# EAGLE board design (EAGLE 9.7.0)
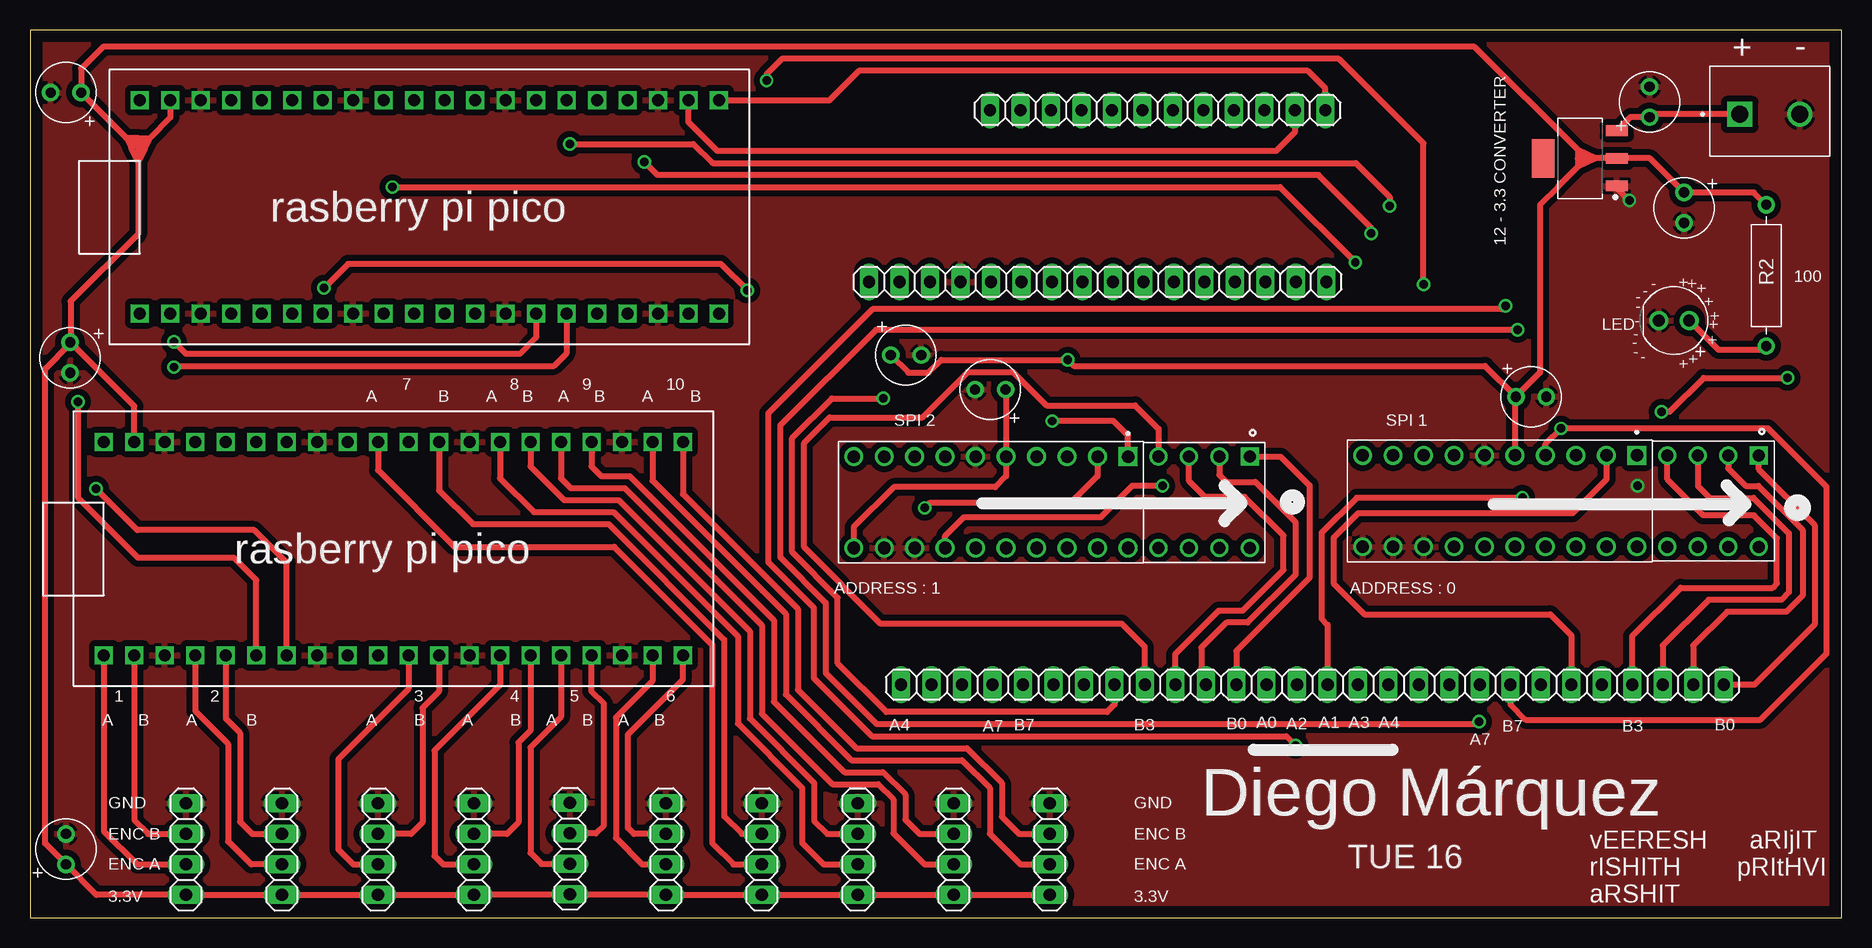
[diagram p0: board, top side]
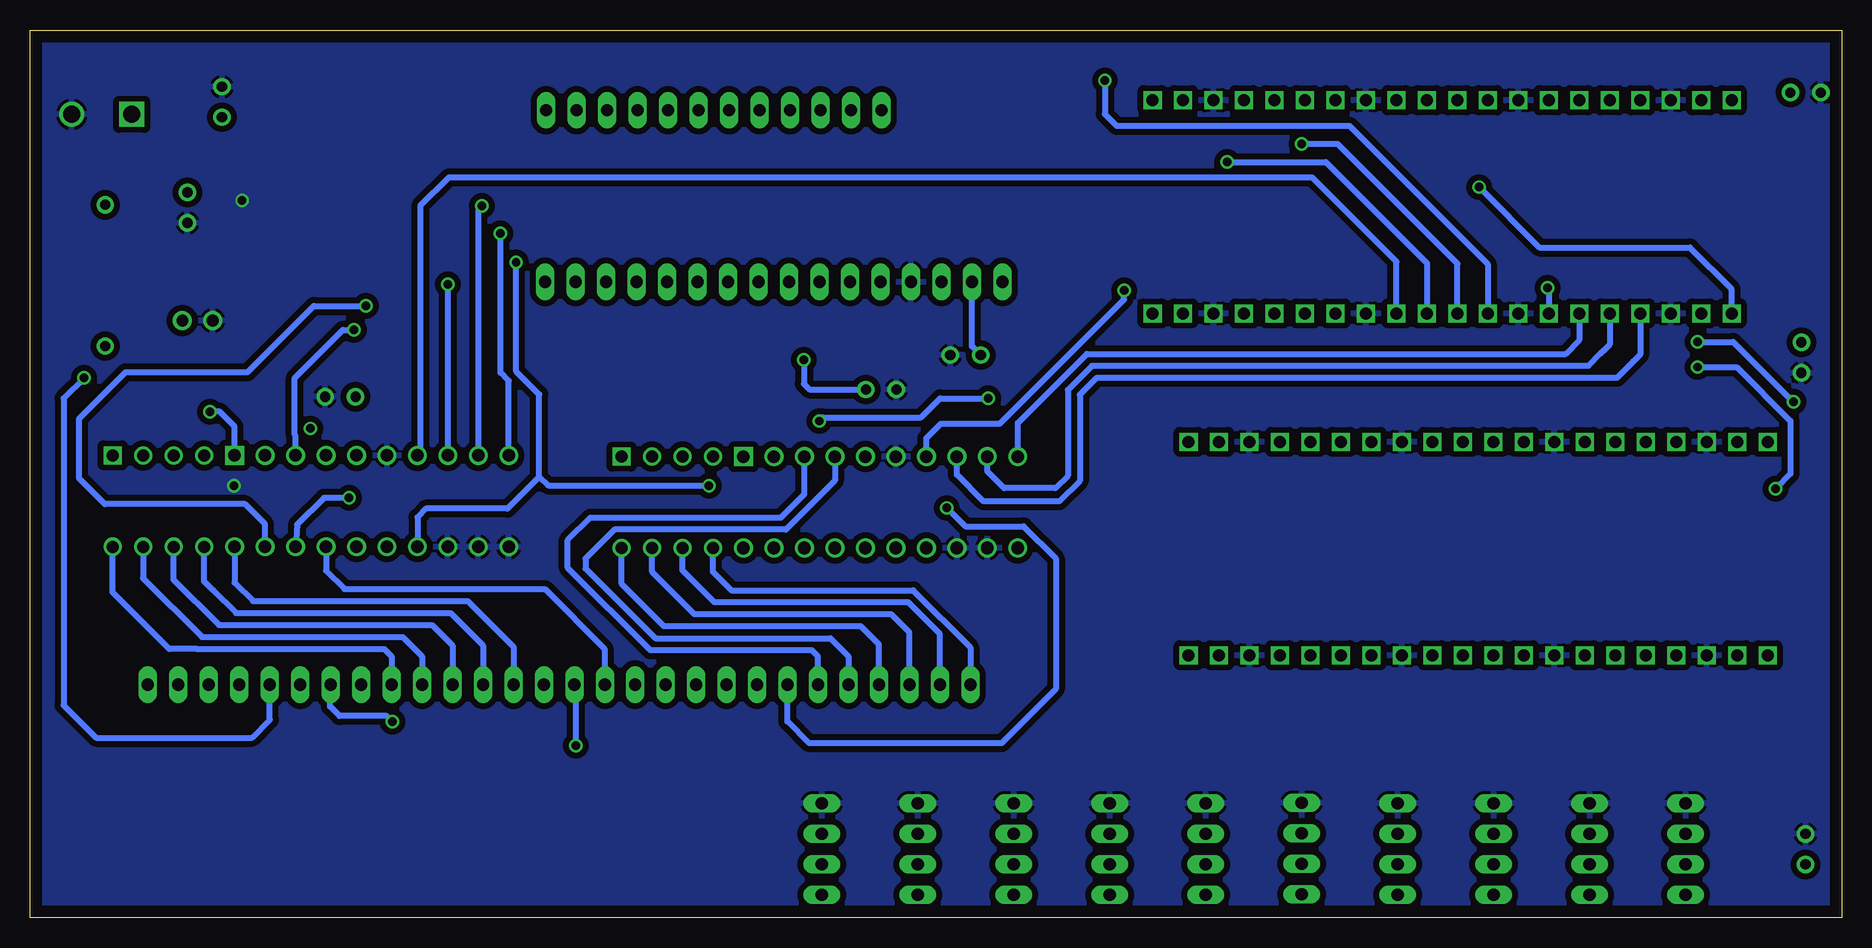
[diagram p1: board, bottom side, seen from below]

Size 151 x 74 mm. Coordinates in mm from the lower left corner, seen from the top.
Outline: 0,0 151,0 151,74 0,74 0,0
Copper layers (1*16): Top 0.035mm / dielectric 1.5mm / Bottom 0.035mm
Design rules "Fusion Electronics Design Rules": minimum track width 0.5mm, minimum drill 0.7mm, track to track 0.5mm, track to pad 0.5mm, pad to pad 1mm, via to via 1mm, smd to smd 6mil, copper to edge 1mm, drill to drill 1mm, minimum pad ring 10mil, minimum via ring 8mil, stop-mask expansion 4mil, vias tented up to drill 9999mil, thermal gap 10mil

## Footprints (pad centres in the part's own frame; a part is rotated, then mirrored left to right if it is on the bottom)
CAPPRD254W65D500H1150B = drill 0.85 pad 1.45: 1 -1.27,0; 2 1.27,0
LEDRD254W60D565H860B_B = drill 0.981 pad 1.581: A -1.27,0; C 1.27,0
SOT230P700X170-4 = smd 1.86 x 0.898: 1 -3.075,2.3; 2 -3.075,0; 3 -3.075,-2.3 | smd 1.86 x 3.189: 4 3.075,0
TE_1-2199298-2 = drill 1 square: 1 -3.81,3.81 | drill 1: 2 -3.81,1.27; 3 -3.81,-1.27; 4 -3.81,-3.81; 5 3.81,-3.81; 6 3.81,-1.27; 7 3.81,1.27; 8 3.81,3.81
AMPHENOL_DILB20P-223TLF = drill 1.05 square: 01 -3.81,11.43 | drill 1.05: 02 -3.81,8.89; 03 -3.81,6.35; 04 -3.81,3.81; 05 -3.81,1.27; 06 -3.81,-1.27; 07 -3.81,-3.81; 08 -3.81,-6.35; 09 -3.81,-8.89; 10 -3.81,-11.43; 11 3.81,-11.43; 12 3.81,-8.89; 13 3.81,-6.35; 14 3.81,-3.81; 15 3.81,-1.27; 16 3.81,1.27; 17 3.81,3.81; 18 3.81,6.35; 19 3.81,8.89; 20 3.81,11.43
HANDSON_KF301-2P = drill 1.4 square: 1 -2.5,0 | drill 1.4: 2 2.5,0
1X12 = drill 1.016 long: 1 -13.97,0; 2 -11.43,0; 3 -8.89,0; 4 -6.35,0; 5 -3.81,0; 6 -1.27,0; 7 1.27,0; 8 3.81,0; 9 6.35,0; 10 8.89,0; 11 11.43,0; 12 13.97,0
1X16 = drill 1.016 long: 1 -19.05,0; 2 -16.51,0; 3 -13.97,0; 4 -11.43,0; 5 -8.89,0; 6 -6.35,0; 7 -3.81,0; 8 -1.27,0; 9 1.27,0; 10 3.81,0; 11 6.35,0; 12 8.89,0; 13 11.43,0; 14 13.97,0; 15 16.51,0; 16 19.05,0
RESAD1176W63L850D250B = drill 0.83 pad 1.43: 1 -5.88,0; 2 5.88,0
RASPBERRY_PI_PICO = drill 1 square: 3V3 8.89,12.7; 3V3_EN 8.89,15.24; ADC_VREF 8.89,10.16; AGND 8.89,5.08; GND 8.89,17.78; GND2 8.89,-7.62; GND3 8.89,-20.32; GND4 -8.89,17.78; GND5 -8.89,5.08; GND6 -8.89,-7.62; GND7 -8.89,-20.32; GP0 -8.89,22.86; GP1 -8.89,20.32; GP2 -8.89,15.24; GP3 -8.89,12.7; GP4 -8.89,10.16; GP5 -8.89,7.62; GP6 -8.89,2.54; GP7 -8.89,0; GP8 -8.89,-2.54; GP9 -8.89,-5.08; GP10 -8.89,-10.16; GP11 -8.89,-12.7; GP12 -8.89,-15.24; GP13 -8.89,-17.78; GP14 -8.89,-22.86; GP15 -8.89,-25.4; GP16 8.89,-25.4; GP17 8.89,-22.86; GP18 8.89,-17.78; GP19 8.89,-15.24; GP20 8.89,-12.7; GP21 8.89,-10.16; GP22 8.89,-5.08; GP26_A0 8.89,0; GP27_A1 8.89,2.54; GP28_A2 8.89,7.62; RUN 8.89,-2.54; VBUS 8.89,22.86; VSYS 8.89,20.32
1X04 = drill 1.016 long: 1 -3.81,0; 2 -1.27,0; 3 1.27,0; 4 3.81,0

## Placement (x,y rotation side)
C1  0.1uf  [CAPPRD254W65D500H1150B]  137.88,59.18 270 top
C2  0.1uf  [CAPPRD254W65D500H1150B]  135,68 90 top
C3  0.1uf  [CAPPRD254W65D500H1150B]  3,5.7 90 top
C4  0.1uf  [CAPPRD254W65D500H1150B]  73.01,46.89 0 top
C23  0.1uf  [CAPPRD254W65D500H1150B]  80.05,44.02 180 top
C24  0.1uf  [CAPPRD254W65D500H1150B]  125.13,43.42 0 top
C26  0.1uf  [CAPPRD254W65D500H1150B]  2.99,68.78 180 top
C27  0.1uf  [CAPPRD254W65D500H1150B]  3.35,46.68 270 top
D1  LED_RADIALBLUE  [LEDRD254W60D565H860B_B]  137.03,49.78 180 top
IC1  LD1117_SOT223  [SOT230P700X170-4]  129.2,63.3 180 top
J1  1-2199298-2  [TE_1-2199298-2]  97.88,34.62 270 top
J2  DILB20P-223TLF  [AMPHENOL_DILB20P-223TLF]  80.09,34.62 270 top
J3  1-2199298-2  [TE_1-2199298-2]  140.3,34.72 270 top
J4  DILB20P-223TLF  [AMPHENOL_DILB20P-223TLF]  122.52,34.72 270 top
J7  KF301-2P  [HANDSON_KF301-2P]  145.02,66.97 0 top
JP1  PINHD-1X12  [1X12]  86.59,19.41 0 top
JP2  PINHD-1X16  [1X16]  122.13,19.41 0 top
JP4  PINHD-1X12  [1X12]  94,67.32 180 top
JP5  PINHD-1X16  [1X16]  89,53 180 top
R2  [RESAD1176W63L850D250B]  144.73,53.54 90 top
U2  RASPBERRY_PI_PICO  [RASPBERRY_PI_PICO]  32.02,59.25 90 top
U3  RASPBERRY_PI_PICO  [RASPBERRY_PI_PICO]  29.02,30.76 90 top
U$1  PINHD-1X04_1X04M  [1X04]  85,5.7 90 top
U$2  PINHD-1X04_1X04M  [1X04]  77,5.7 90 top
U$3  PINHD-1X04_1X04M  [1X04]  69,5.7 90 top
U$4  PINHD-1X04_1X04M  [1X04]  61,5.7 90 top
U$5  PINHD-1X04_1X04M  [1X04]  53,5.7 90 top
U$6  PINHD-1X04_1X04M  [1X04]  45,5.75 90 top
U$7  PINHD-1X04_1X04M  [1X04]  37,5.7 90 top
U$8  PINHD-1X04_1X04M  [1X04]  29,5.7 90 top
U$9  PINHD-1X04_1X04M  [1X04]  21,5.7 90 top
U$10  PINHD-1X04_1X04M  [1X04]  13,5.7 90 top

## Library data of the parts
C1-C4 C23 C24 C26 C27 IC1 U$1-U$10 = Tinkercad
D1 = Opto-Electronic
J1 J3 = 1-2199298-2; AVAILABILITY: In Stock; CHECK_PRICES: https://www.snapeda.com/parts/1-2199298-2/TE+Connectivity+AMP+Connectors/view-part/?ref=eda; COMMENT: 1-2199298-2; DESCRIPTION: CONN IC DIP SOCKET 8POS TIN / 8 (2 x 4) Pos DIP, 0.3 (7.62mm) Row Spacing Socket Tin Through Hole; MF: TE Connectivity; MP: 1-2199298-2; PACKAGE: PDIP-8 TE Connectivity; PRICE: None; SNAPEDA_LINK: https://www.snapeda.com/parts/1-2199298-2/TE+Connectivity+AMP+Connectors/view-part/?ref=snap
J2 J4 = DILB20P-223TLF; AVAILABILITY: In Stock; CHECK_PRICES: https://www.snapeda.com/parts/DILB20P-223TLF/Amphenol/view-part/?ref=eda; DESCRIPTION: 20 (2 x 10) Pos DIP, 0.3 (7.62mm) Row Spacing Socket Tin Through Hole; MF: FCI Connectors; MP: DILB20P-223TLF; PACKAGE: None; PRICE: None; SNAPEDA_LINK: https://www.snapeda.com/parts/DILB20P-223TLF/Amphenol/view-part/?ref=snap
J7 = KF301-2P; AVAILABILITY: Not in stock; CHECK_PRICES: https://www.snapeda.com/parts/KF301-2P/Handson+Technology/view-part/?ref=eda; DESCRIPTION: 2 Pin Terminal Block 5mm Pitch; MF: Handson Technology; MP: KF301-2P; PACKAGE: None; PRICE: None; SNAPEDA_LINK: https://www.snapeda.com/parts/KF301-2P/Handson+Technology/view-part/?ref=snap
JP1 JP4 = Connector; CATEGORY: Headers; DESCRIPTION: Header, Straight, 12 Position; MANUFACTURER: Generic; MPN: Generic; OPERATING_TEMPERATURE: Generic; PART_STATUS: Active; PITCH: 0.100" (2.54mm); ROHS_COMPLIANCE: Generic; SERIES: Generic; SUB-CATEGORY: Headers, Male Pins; TYPE: Board to Board or Cable, Unshrouded, Through Hole, Straight
JP2 JP5 = Connector; CATEGORY: Headers; DESCRIPTION: Header, Straight, 16 Position; MANUFACTURER: Generic; MPN: Generic; OPERATING_TEMPERATURE: Generic; PART_STATUS: Active; PITCH: 0.100" (2.54mm); ROHS_COMPLIANCE: Generic; SERIES: Generic; SUB-CATEGORY: Headers, Male Pins; TYPE: Board to Board or Cable, Unshrouded, Through Hole, Straight
R2 = Resistor; CATEGORY: Resistor; SUB-CATEGORY: Fixed
U2 U3 = RASPBERRY_PI_PICO; AVAILABILITY: In Stock; CHECK_PRICES: https://www.snapeda.com/parts/RASPBERRY%20PI%20PICO/Raspberry+Pi/view-part/?ref=eda; DESCRIPTION: Raspberry Pi Board, Arm Cortex-M0+; Core Architecture:Arm; Core Sub-Architecture:Cortex-M0+; Kit Contents:Raspberry Pi Pico Board; No. Of Bits:32Bit; Silicon Core Number:Rp2040; Silicon Manufacturer:Raspberry Pi |Raspberry-Pi RASPBERRY PI PICO; MF: Raspberry Pi; MP: RASPBERRY PI PICO; PACKAGE: None; PRICE: None; SNAPEDA_LINK: https://www.snapeda.com/parts/RASPBERRY%20PI%20PICO/Raspberry+Pi/view-part/?ref=snap

## Nets
3.3V: C1.1 C3.1 C4.1 C23.1 C24.1 C26.1 C27.1 IC1.2 J2.05 J2.11 J4.05 JP5.15 R2.2 U2.VSYS U3.VSYS U$1.1 U$2.1 U$3.1 U$4.1 U$5.1 U$6.1 U$7.1 U$8.1 U$9.1 U$10.1
12V: C2.1 IC1.3 J7.1
CS1: J2.07 U2.GP5
CS2: J4.07 U2.GP9
ENC_1A: U3.GP0 U$10.2
ENC_1B: U3.GP1 U$10.3
ENC_2A: U3.GP2 U$9.2
ENC_2B: U3.GP3 U$9.3
ENC_3A: U3.GP8 U$8.2
ENC_3B: U3.GP9 U$8.3
ENC_4A: U3.GP10 U$7.2
ENC_4B: U3.GP11 U$7.3
ENC_5A: U3.GP12 U$6.2
ENC_5B: U3.GP13 U$6.3
ENC_6A: U3.GP14 U$5.2
ENC_6B: U3.GP15 U$5.3
ENC_7A: U3.GP26_A0 U$4.2
ENC_7B: U3.GP22 U$4.3
ENC_8A: U3.GP21 U$3.2
ENC_8B: U3.GP20 U$3.3
ENC_9A: U3.GP19 U$2.2
ENC_9B: U3.GP18 U$2.3
ENC_10A: U3.GP17 U$1.2
ENC_10B: U3.GP16 U$1.3
GND: C1.2 C2.2 C3.2 C4.2 C23.2 C24.2 C26.2 C27.2 D1.C IC1.1 J2.06 J2.12 J2.13 J4.06 J4.11 J4.12 J4.13 J7.2 JP5.13 U2.AGND U2.GND U2.GND2 U2.GND3 U2.GND4 U2.GND5 U2.GND6 U2.GND7 U3.AGND U3.GND U3.GND2 U3.GND3 U3.GND4 U3.GND5 U3.GND6 U3.GND7 U$1.4 U$2.4 U$3.4 U$4.4 U$5.4 U$6.4 U$7.4 U$8.4 U$9.4 U$10.4
GPA1: J3.8 JP2.8
LS1: J1.5 JP1.1
N$1: D1.A R2.1
N$2: J1.1 JP1.12
N$3: J1.2 JP1.11
N$4: J1.3 JP1.10
N$5: J1.4 JP1.9
N$6: J2.01 JP1.8
N$7: J1.8 JP1.4
N$8: J1.7 JP1.3
N$9: J2.02 JP1.7
N$10: J2.03 JP1.6
N$11: J2.04 JP1.5
N$12: J3.1 JP2.16
N$13: J3.2 JP2.15
N$14: J3.3 JP2.14
N$15: J3.4 JP2.13
N$16: J4.01 JP2.12
N$17: J1.6 JP1.2
N$18: J4.02 JP2.11
N$19: J4.03 JP2.10
N$20: J4.04 JP2.9
N$24: J3.7 JP2.7
N$25: J3.6 JP2.6
N$26: J3.5 JP2.5
N$27: J4.20 JP2.4
N$28: J4.18 JP2.3
N$33: J4.19 JP2.2
N$34: J4.17 JP2.1
RST: J2.14 J4.14 U2.GP0
SCL1: U2.GP11 U3.GP5
SCL2: JP4.2 U2.GP17
SDA1: U2.GP10 U3.GP4
SDA2: JP4.1 U2.GP16
SPI1CLK: J2.08 U2.GP2
SPI1RX: J2.10 U2.GP4
SPI1TX: J2.09 U2.GP3
SPI2CLK: J4.08 U2.GP6
SPI2RX: J4.10 U2.GP8
SPI2TX: J4.09 U2.GP7

## Tracks (layer width: path | path; a pad name or v marks a point on that pad's centre or on a via)
3.3V  (via drill 0.7 pad 1)
  Top 0.5: J4.05 123.79,43.35 C24.1 | J2.11 68.66,32.55 72.01,35.89 80.46,35.89 81.37,36.8 J2.05 81.37,43.98 C23.1 | U3.VSYS 8.7,42.64 3.39,47.95 | 3.39,47.95 C27.1 3.35,47.84 1.25,45.75 1.25,6.18 C3.1 5.54,1.89 U$10.1 U$9.1 U$8.1 U$7.1 37.05,1.94 U$6.1 52.95,1.94 U$5.1 U$4.1 U$3.1 U$2.1 U$1.1 | C24.1 125.86,45.42 125.86,59.42 127.39,60.96 127.37,60.96 129,62.59 | 129.71,63.3 130.5,63.3 | 130.5,63.3 IC1.2 135.03,63.3 C1.1 143.7,60.45 R2.2 | 129.71,63.3 129,62.59 | C4.1 73.22,45.42 74.9,45.42 75.98,46.5 v86.5,46.5 87,46 121.28,46 C24.1 | 129.71,63.3 129,64 | 129,64 120.41,72.6 6.09,72.6 4.27,70.78 C26.1 8.02,65.02 | 9,63 9,57 3.39,51.39 3.39,47.95 | 10,65 11.7,66.7 U2.VSYS | 129,64 129,63.3 | 129,63.3 129,62.59 | 129,62.59 130.5,63.3 | 130.5,63.3 129,64 | 129.71,63.3 129,63.3 | 8.02,65.02 8.02,65.01 | 8.02,65.01 8.42,64.2 | 8.42,64.2 9,63 | 8.02,65.02 9,65.01 | 9,65.01 10,65 | 9,63 9.6,64.2 | 9.6,64.2 10,65 | 9,65.01 9,63 | 8.42,64.2 10,65 | 9.6,64.2 8.02,65.01
  Bottom 0.5: v86.5,46.5 86.5,44.5 86.02,44.02 C23.1 | C4.1 72.49,47.64 JP5.15
12V
  Top 0.5: IC1.3 133.41,66.73 C2.1 135.24,66.97 J7.1
CS1  (via drill 0.7 pad 1)
  Top 0.5: v24.5,52.5 26.5,54.5 57.6,54.5 v59.8,52.3
  Bottom 0.5: v59.8,52.3 59.8,51.53 70.16,41.17 75.08,41.17 76.28,39.97 J2.07 | v24.5,52.5 24.46,52.5 24.4,52.44 U2.GP5
CS2
  Bottom 0.5: J4.07 118.46,38.78 118.46,59.34 116.1,61.7 44.11,61.7 37.1,54.69 U2.GP9
ENC_1A
  Top 0.5: U3.GP0 6.16,7.21 8.94,4.43 U$10.2
ENC_1B
  Top 0.5: U3.GP1 8.7,8.11 9.84,6.97 U$10.3
ENC_2A
  Top 0.5: U$9.2 18.44,4.43 16.52,6.35 16.52,14.47 13.78,17.22 U3.GP2
ENC_2B
  Top 0.5: U$9.3 18.54,6.97 17.52,7.99 17.52,15.39 16.32,16.59 U3.GP3
ENC_3A
  Top 0.5: U$8.2 26.94,4.43 25.7,5.67 25.7,13.21 31.56,19.07 U3.GP8
ENC_3B
  Top 0.5: U$8.3 31.76,6.97 32.73,7.93 32.73,17.47 34.1,18.84 U3.GP9
ENC_4A
  Top 0.5: U3.GP10 39.18,19.39 33.73,13.94 33.73,5.14 34.44,4.43 U$7.2
ENC_4B
  Top 0.5: U$7.3 39.76,6.97 40.73,7.93 40.73,14.6 41.72,15.59 U3.GP11
ENC_5A
  Top 0.5: U3.GP12 44.26,16.72 41.73,14.18 41.73,5.39 42.64,4.48 U$6.2
ENC_5B
  Top 0.5: U$6.3 47.16,7.02 47.84,7.69 47.84,17.83 46.8,18.87 U3.GP13
ENC_6A
  Top 0.5: U$5.2 51.04,4.43 48.84,6.63 48.84,16.67 51.88,19.72 U3.GP14
ENC_6B
  Top 0.5: U$5.3 50.34,6.97 49.84,7.47 49.84,15.26 54.42,19.84 U3.GP15
ENC_7A
  Top 0.5: U3.GP26_A0 29.02,37.3 35.41,30.91 48.7,30.91 56.87,22.74 56.87,6.2 58.64,4.43 U$4.2
ENC_7B
  Top 0.5: U$4.3 59.34,6.97 57.87,8.44 57.87,23.16 48.23,32.8 36.92,32.8 34.1,35.62 U3.GP22
ENC_8A
  Top 0.5: U3.GP21 39.18,36.62 42,33.8 48.64,33.8 59,23.44 59,16.17 64.37,10.8 64.37,6.21 66.16,4.43 U$3.2
ENC_8B
  Top 0.5: U3.GP20 41.72,37.62 44.54,34.8 49.06,34.8 60,23.86 60,16.59 65.37,11.21 65.37,8.04 66.44,6.97 U$3.3
ENC_9A
  Top 0.5: U3.GP19 44.26,36.62 45.08,35.8 49.57,35.8 61,24.37 61,17 66.88,11.12 70.69,11.12 71.97,9.84 71.97,7.03 74.57,4.43 U$2.2
ENC_9B
  Top 0.5: U3.GP18 46.8,37.62 47.62,36.8 49.99,36.8 62,24.79 62,18 67.88,12.12 71.1,12.12 72.97,10.25 72.97,8.15 74.16,6.97 U$2.3
ENC_10A
  Top 0.5: U3.GP17 51.88,36.43 61.05,27.27 61.05,27.25 63,25.3 63,18.59 68.46,13.12 77.68,13.12 80,10.8 80,7 82.57,4.43 U$1.2
ENC_10B
  Top 0.5: U3.GP16 54.42,35.31 64,25.73 64,19 68.88,14.12 78.09,14.12 81,11.21 81,8.41 82.44,6.97 U$1.3
GND  (via drill 0.7 pad 1)
  Top 0.5: IC1.1 132.28,60.82 v133.32,59.78
  other vias: 134,36
  pour Bottom (isolate 0.5): -0.75,-4.75 151.75,-4.75 151.75,75.75 -0.75,75.75
  pour Top (isolate 0.5): 3.1,-8.75 148.9,-8.75 153.75,-3.9 153.75,76.75 -2.75,76.75 -2.75,-2.9
GPA1
  Bottom 0.5: JP2.8 120.86,21.77 121.46,22.38 137,22.38 137.07,22.38 139.38,22.38 144.11,27.11 J3.8
LS1
  Bottom 0.5: JP1.1 72.62,22.52 77.38,27.28 92.53,27.28 94.06,28.81 J1.5
N$1
  Top 0.5: R2.1 144.39,47.32 140.76,47.32 D1.A
N$2
  Top 0.5: JP1.12 100.56,22.23 106.65,28.32 106.65,36.02 104.24,38.43 J1.1
N$3
  Top 0.5: JP1.11 97.64,19.78 97.64,22.5 99.73,24.59 101.5,24.59 105.49,28.58 105.49,32.97 102.13,36.33 99.72,36.33 99.14,36.9 J1.2
N$4
  Top 0.5: JP1.10 95.48,21.97 99.09,25.59 101.08,25.59 104.49,28.99 104.49,31.84 101.24,35.08 97.92,35.08 96.61,36.39 J1.3
N$5
  Top 0.5: JP1.9 92.94,22.57 91.01,24.5 70.9,24.5 64.53,30.88 64.53,39.57 66.66,41.7 74.38,41.7 78.17,45.5 81.93,45.5 84.73,42.7 92.11,42.7 94.06,40.75 J1.4
N$6  (via drill 0.7 pad 1)
  Top 0.5: J2.01 91.53,40.17 90.3,41.4 v85.2,41.4 | JP1.8 90.4,17.75 89.78,17.14 71.39,17.14 67.33,21.2 67.33,26.66 63.53,30.46 63.53,39.98 66.83,43.29 v71.13,43.29
  Bottom 0.5: v71.13,43.29 75.13,43.29 76.72,41.7 84.9,41.7 v85.2,41.4
N$7
  Bottom 0.5: J1.8 101.69,27.81 98.15,24.28 81.74,24.28 80.24,22.77 JP1.4
N$8
  Bottom 0.5: JP1.3 77.7,23.77 79.2,25.28 95.61,25.28 99.14,28.81 J1.7
N$9  (via drill 0.7 pad 1)
  Top 0.5: J2.02 88.98,36.8 86.74,34.55 74.97,34.55 v74.58,34.15
  Bottom 0.5: JP1.7 87.86,16.35 86.04,14.54 70.02,14.54 65.5,19.05 65.5,29.93 68.18,32.61 73.03,32.61 v74.58,34.15
N$10
  Bottom 0.5: J2.03 86.44,35.31 88.4,33.35 104.29,33.35 106.18,31.46 106.18,29.16 99.29,22.28 85.82,22.28 85.32,21.77 JP1.6
N$11
  Bottom 0.5: J2.04 83.91,36.43 87.99,32.35 102.27,32.35 104.69,29.94 104.69,29.09 98.87,23.28 84.28,23.28 82.78,21.77 JP1.5
N$12
  Top 0.5: J3.1 144.11,37.37 148.75,32.73 148.75,24.42 143.74,19.41 JP2.16
N$13
  Top 0.5: J3.2 141.57,37.45 141.55,37.45 143,36 144.06,36 147.75,32.31 147.75,26.84 146.41,25.5 141.47,25.5 138.64,22.67 JP2.15
N$14
  Top 0.5: J3.3 139.03,35.97 140,35 143.65,35 146.61,32.04 146.61,27.11 146,26.5 139.93,26.5 136.1,22.67 JP2.14
N$15
  Top 0.5: J3.4 136.49,36.53 139.48,33.54 143.69,33.54 145.61,31.62 145.61,27.86 145.25,27.5 137.59,27.5 133.56,23.47 JP2.13
N$16  (via drill 0.7 pad 1)
  Top 0.5: v136,42.17 136.67,42.17 139.5,45 v146.5,45
  Bottom 0.5: J4.01 133.95,40.93 135.19,42.17 v136,42.17 | JP2.12 131.02,16.48 132.5,15 145.5,15 148.2,17.7 148.2,43.3 v146.5,45
N$17
  Bottom 0.5: JP1.2 75.16,23.64 77.79,26.28 93.94,26.28 96.61,28.94 J1.6
N$18
  Top 0.5: JP2.11 128.48,23.52 126.71,25.29 111.23,25.29 108.65,27.86 108.65,31.65 110.7,33.7 128.57,33.7 131.41,36.53 J4.02
N$19  (via drill 0.7 pad 1)
  Top 0.5: v124,49 70.5,49 62.53,41.03 62.53,30.05 66.33,26.25 66.33,20.39 70.58,16.14 120.6,16.14 v120.8,16.33
  Bottom 0.5: v124,49 124.92,49 128.93,44.99 128.93,40.24 128.87,40.17 J4.03 | v120.8,16.33 121.27,16.8 125.2,16.8 126,17.6 126,19.35 JP2.10
N$20  (via drill 0.7 pad 1)
  Top 0.5: JP2.9 123.4,17.75 124.65,16.5 144.24,16.5 149.75,22.01 149.75,35.91 144.88,40.78 v127.63,40.78 126.33,39.48 J4.04
N$24
  Bottom 0.5: JP2.7 118.32,21.77 119.92,23.38 136.65,23.38 141.57,28.29 J3.7
N$25
  Bottom 0.5: JP2.6 115.78,22.67 117.48,24.38 135.24,24.38 139.03,28.17 J3.6
N$26
  Bottom 0.5: JP2.5 113.24,22.67 115.94,25.38 133.82,25.38 135.72,27.28 135.95,27.5 136.49,28.04 J3.5
N$27
  Bottom 0.5: J4.20 133.95,27.91 132.41,26.38 114.5,26.38 110.7,22.57 JP2.4
N$28  (via drill 0.7 pad 1)
  Top 0.5: v124.4,35 110.58,35 107.65,32.06 107.65,24.92 108.16,24.41 JP2.3
  Bottom 0.5: J4.18 128.74,32.76 126.5,35 v124.4,35
N$33  (via drill 0.7 pad 1)
  Top 0.5: v123,51 122.73,50.73 70.23,50.73 61.53,42.03 61.53,29.63 65.33,25.83 65.33,19.97 70.18,15.12 104.71,15.12 v105.5,14.33
  Bottom 0.5: v123,51 127.34,51 132.86,45.47 143.03,45.47 146.9,41.6 146.9,36.61 144.76,34.47 133.08,34.47 131.41,32.8 J4.19 | JP2.2 105.5,19.29 v105.5,14.33
N$34
  Bottom 0.5: J4.17 126.33,28.91 124.79,27.38 108.08,27.38 103.11,22.4 103.11,19.44 JP2.1
RST  (via drill 0.7 pad 1)
  Top 0.5: J2.14 76.28,31.81 77.87,33.39 89.26,33.39 91.87,36 v94.4,36 | v30.2,60.9 104.2,60.9 v110.48,54.62
  Bottom 0.5: 108.55,36.75 111.2,34.1 117.98,34.1 118.71,33.37 J4.14 | v30.2,60.9 25.17,55.87 12.63,55.87 9.16,52.39 U2.GP0 | 108.55,36.75 108.55,43.61 110.48,45.54 v110.48,54.62 | 108.55,36.75 107.82,36.02 94.42,36.02 v94.4,36
SCL1  (via drill 0.7 pad 1)
  Top 0.5: U3.GP5 21.4,29.6 18.7,32.3 8.94,32.3 v5.5,35.74 | v12,45.89 12.11,46 43.68,46 44.72,47.04 U2.GP11
  Bottom 0.5: v5.5,35.74 4.26,36.98 4.26,41.41 8.74,45.89 v12,45.89
SCL2
  Top 0.5: U2.GP17 54.88,66.32 57.3,63.9 103.87,63.9 105.43,65.46 JP4.2
SDA1  (via drill 0.7 pad 1)
  Top 0.5: v12,48 13,47 40.84,47 42.18,48.34 U2.GP10 | U3.GP4 18.86,28.14 17,30 9,30 4,35 v4,43
  Bottom 0.5: v4,43 4.02,43 9.02,48 v12,48
SDA2
  Top 0.5: U2.GP16 66.65,68.15 69.1,70.6 106.5,70.6 107.97,69.13 JP4.1
SPI1CLK
  Bottom 0.5: J2.08 73.75,36.93 71.51,34.69 65.21,34.69 63.5,36.41 63.5,43.59 62.09,45 18.72,45 17.36,46.36 17.12,46.6 16.78,46.94 U2.GP2
SPI1RX
  Bottom 0.5: J2.10 68.66,41.25 62.91,47 23,47 21.86,48.14 U2.GP4
SPI1TX
  Bottom 0.5: J2.09 71.2,37.2 69.8,35.8 65.53,35.8 64.5,36.82 64.5,44 62.5,46 21.1,46 20.05,47.05 19.82,47.28 19.32,47.78 U2.GP3
SPI2CLK  (via drill 0.7 pad 1)
  Top 0.5: v116.16,52.8 116.16,64.54 109.1,71.6 62.69,71.6 61.4,70.31 v61.4,69.8
  Bottom 0.5: J4.08 v116.17,52.79 v116.16,52.8 | U2.GP6 29.48,54.48 41,66 60.4,66 61.4,67 v61.4,69.8
SPI2RX  (via drill 0.7 pad 1)
  Top 0.5: v111.78,57.05 111.78,57.52 107.4,61.9 52.3,61.9 v51.2,63
  Bottom 0.5: J4.10 111.09,44.73 111.78,45.43 v111.78,57.05 | v51.2,63 43,63 34.56,54.56 U2.GP8
SPI2TX  (via drill 0.7 pad 1)
  Top 0.5: v113.34,59.34 113.34,60.06 110.5,62.9 56.88,62.9 55.28,64.5 v45,64.5
  Bottom 0.5: v45,64.5 42,64.5 32.02,54.52 U2.GP7 | J4.09 113.63,59.05 v113.34,59.34

## Text on the board
tPlace: + | - | 12 - 3.3 CONVERTER | + | 100 | - | - | + | + | - | - | + | + | LED | - | + | - | + | - | - | - | + | + | 7 | 8 | 9 | 10 | A | B | A | B | A | B | A | B | SPI 2 | SPI 1 | ADDRESS : 1 | ADDRESS : 0 | 1 | 2 | 3 | 4 | 5 | 6 | A | B | A | B | A | B | A | B | A | B | A | B | A4 | B7 | B3 | B0 | A0 | A2 | A1 | A3 | A4 | B0 | A7 | B7 | B3 | A7 | GND | GND | Diego Márquez | ENC B | ENC B | ENC A | ENC A | TUE 16 | 3.3V | 3.3V | vEERESH aRIjIT / rISHITH pRItHVI / aRSHIT